# Altium PCB MCU.PcbDoc
Units mil, origin at the board's own origin, x right, y up, seen from the top; angles counter-clockwise.
Board outline 2836.05 x 2266.15 mil, 2 copper layers (Top Layer, Bottom Layer); 32 components, 32 nets, 152 pads, 29 vias.
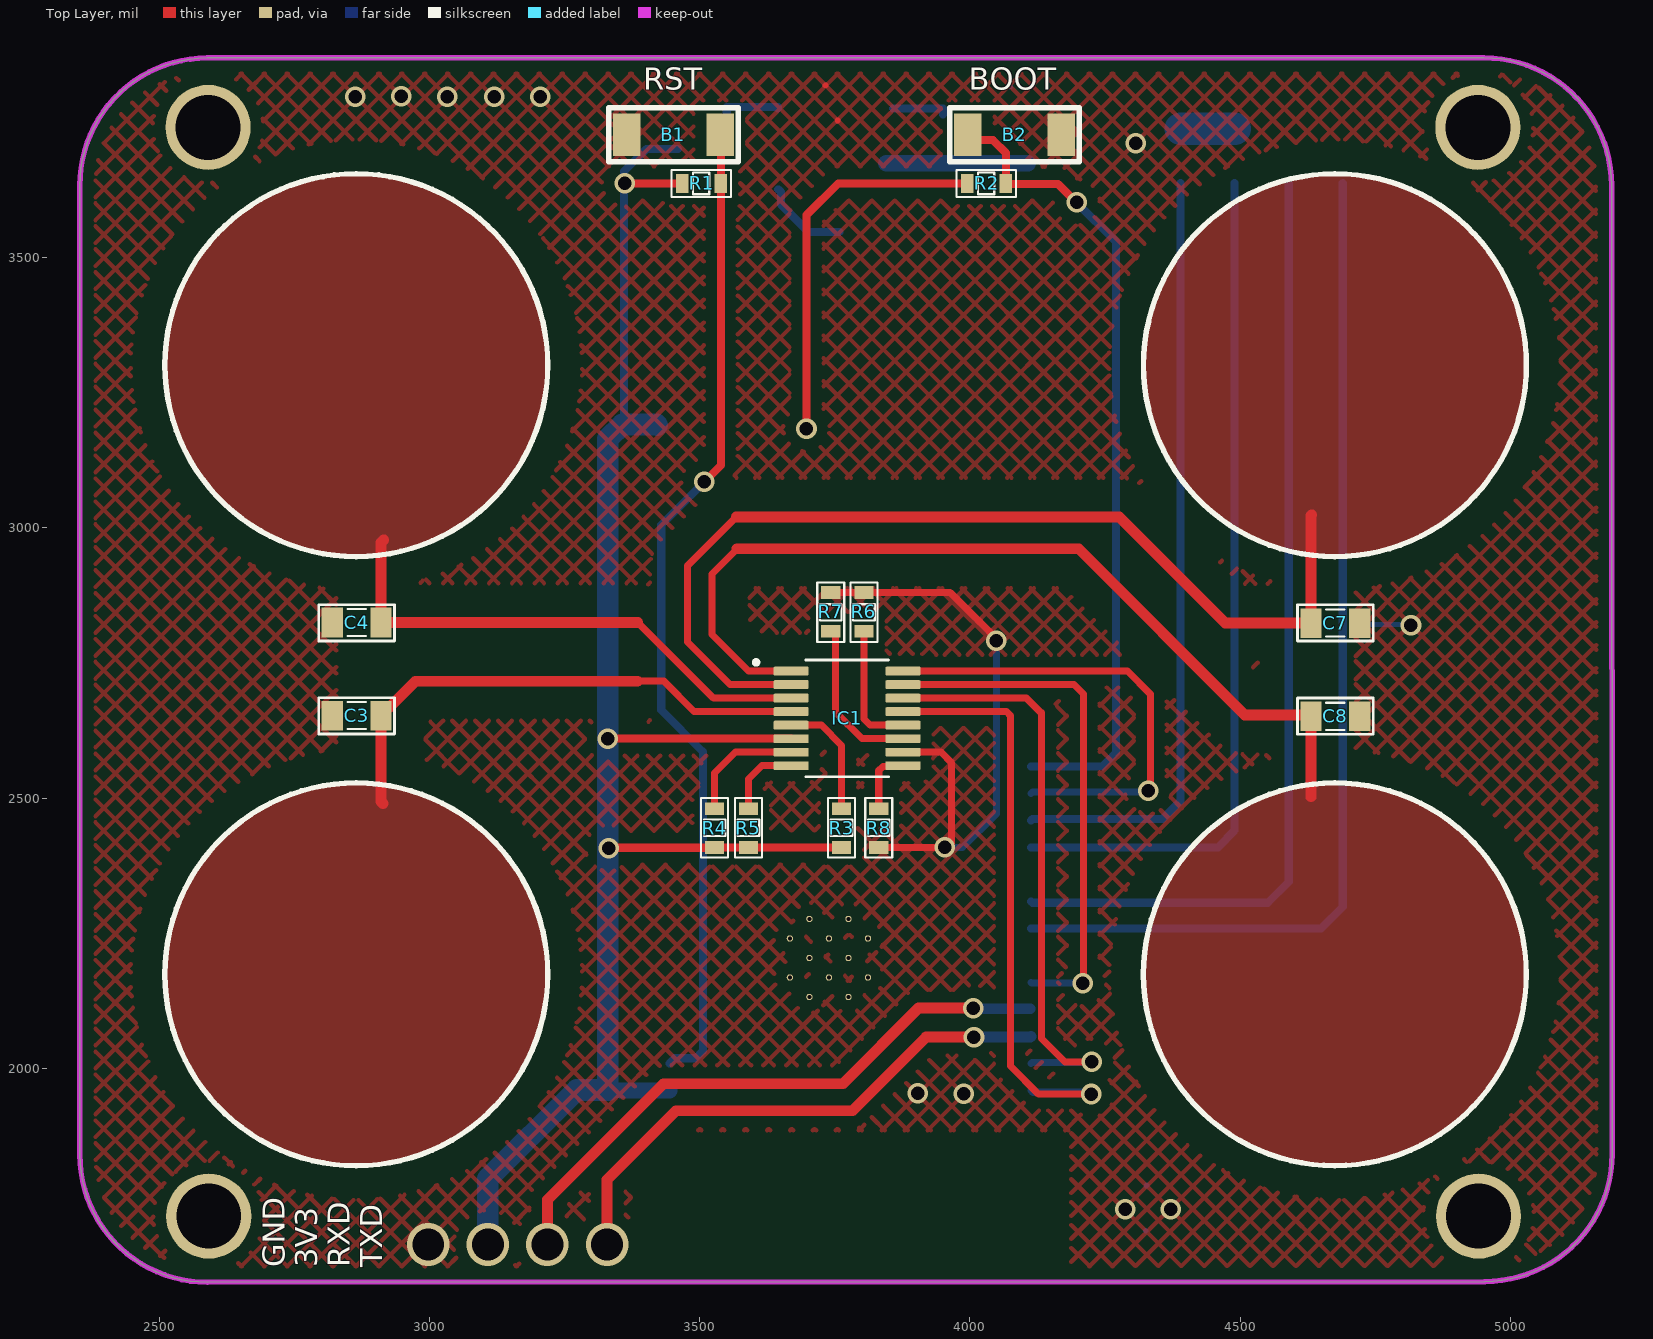
[diagram p0: Top Layer view]
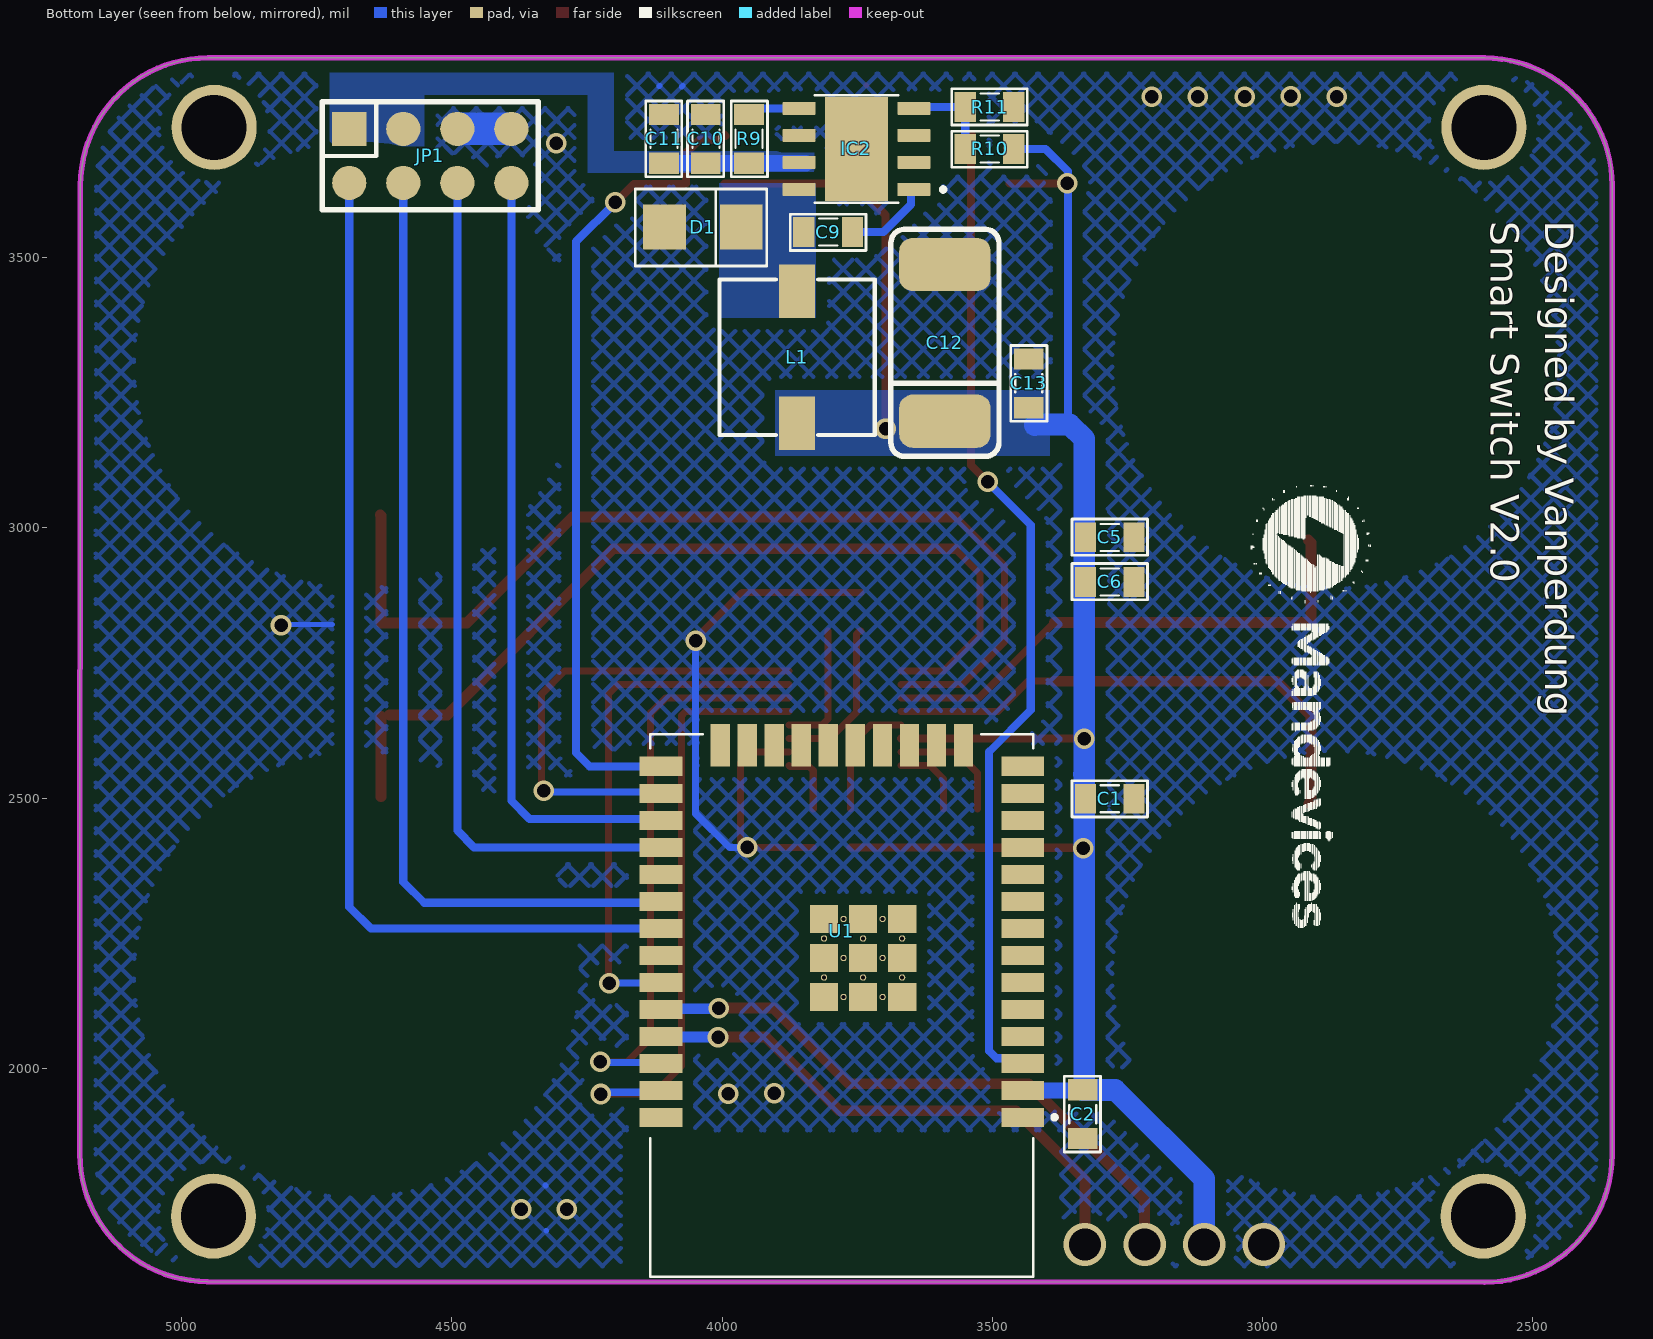
[diagram p1: Bottom Layer view, seen from below]
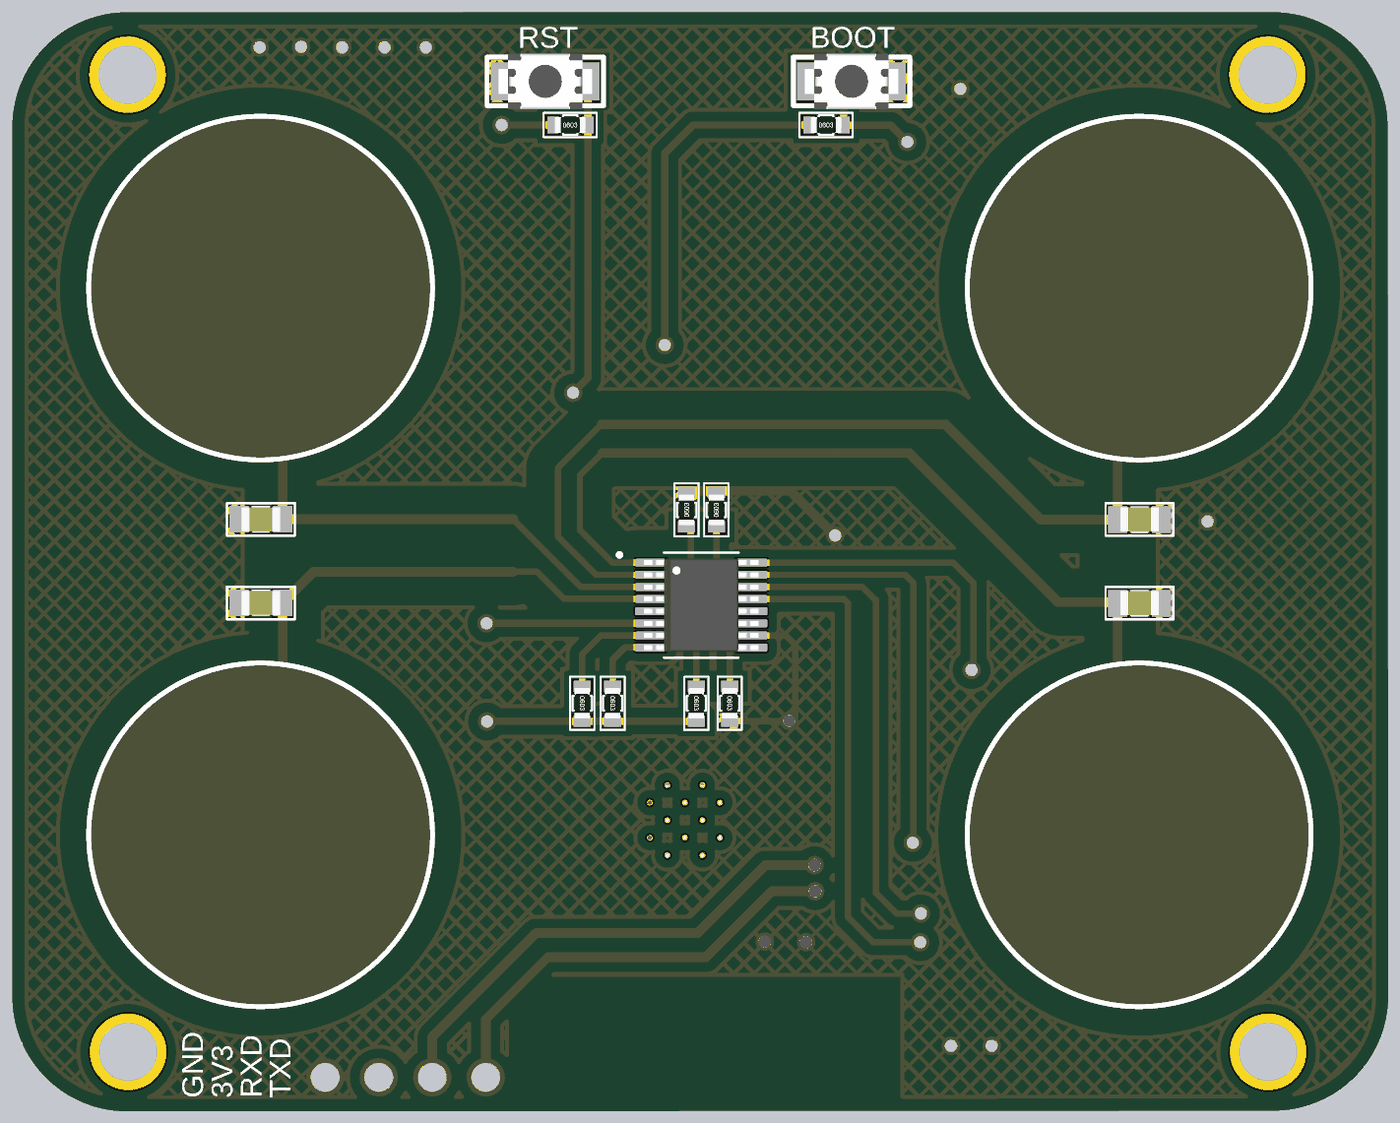
[diagram p2: 3D render of the assembled board from above, using the file's embedded part models]
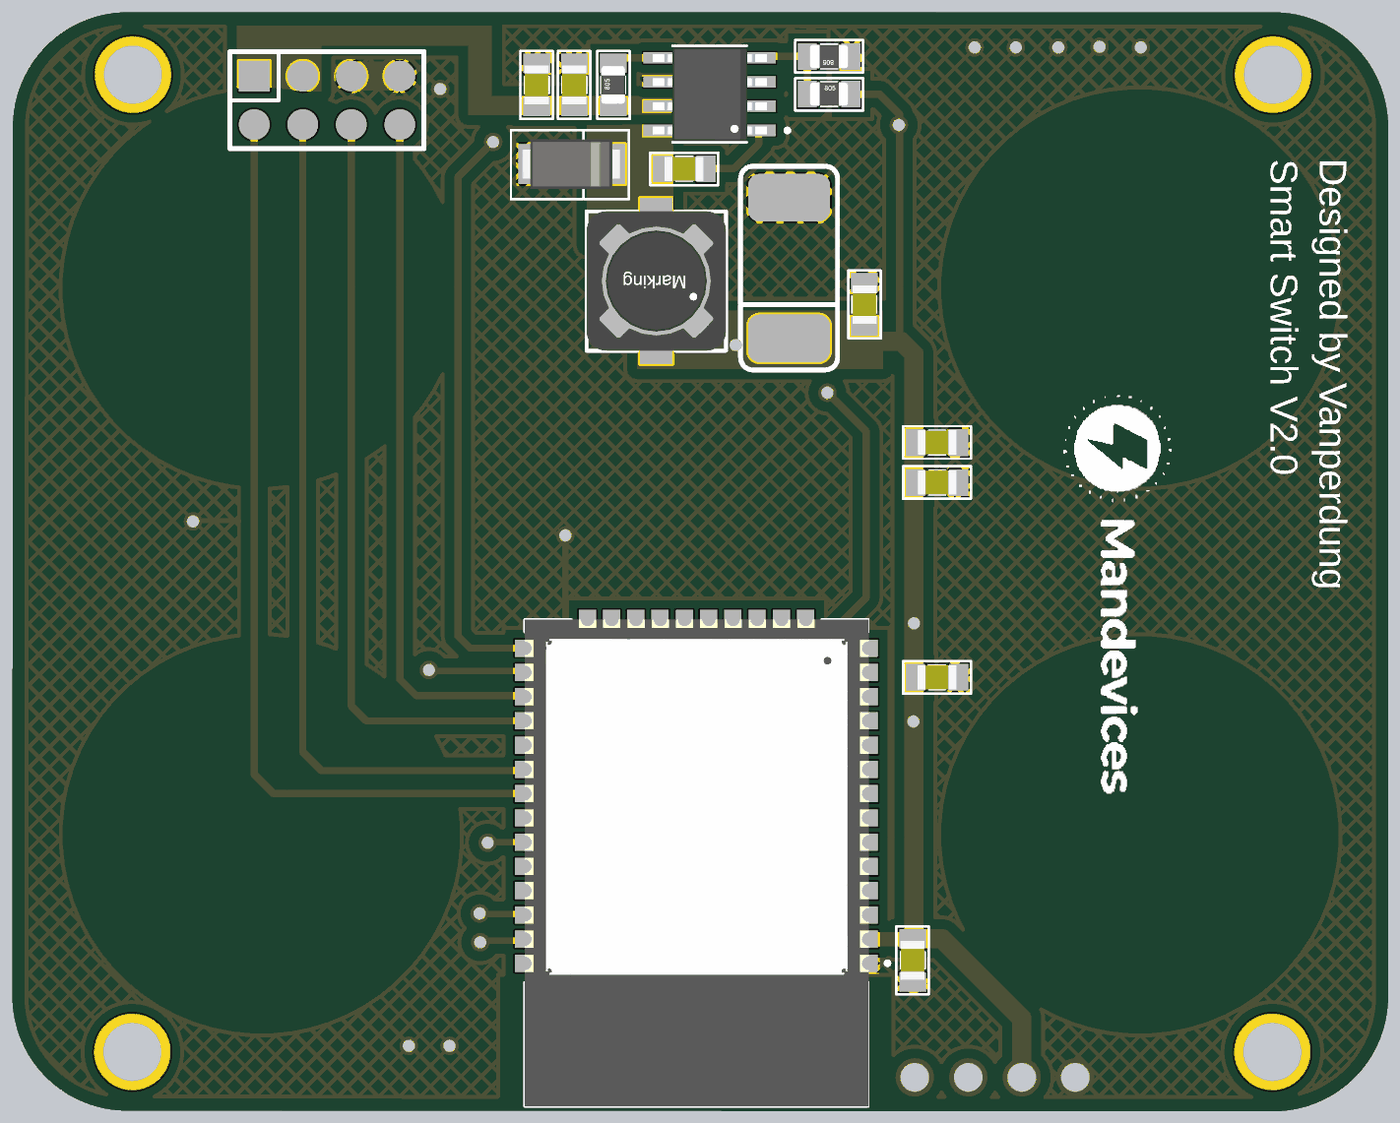
[diagram p3: 3D render of the assembled board from below, using the file's embedded part models]

## Layer stack, top to bottom
Top Solder: solder mask 0.4, Solder Resist, Dk 3.5
Top Layer: signal copper 1.4
Dielectric 1: dielectric 12.6, FR-4, Dk 4.8
Bottom Layer: signal copper 1.4
Bottom Solder: solder mask 0.4, Solder Resist, Dk 3.5

## Board outline
2352.68,1840.07 ccw(c2588.9,1840.07) 2588.9,1603.85 4952.43,1605.18 ccw(c4952.43,1841.4) 5188.65,1841.4 5187.47,3633.78 ccw(c4951.25,3633.78) 4951.25,3870 2588.82,3869.82 ccw(c2588.82,3633.6) 2352.6,3633.6

## Design rules (kind name [scope] priority, off if disabled: settings)
Clearance TP_Clearance [InNetClass('TP')] p1: gap=59.06 ignorepadtopadclearanceinfootprint=TRUE
Clearance [All] p2: gap=20 ignorepadtopadclearanceinfootprint=TRUE
PolygonConnect [All] p1: connectstyle=Direct reliefconductorwidth=10 reliefentries=4 polygonreliefangle="90 Angle" airgapwidth=10
RoutingVias [All] p1: holewidth=28 width=50 viastyle="Through Hole" minholewidth=15 minwidth=30 maxholewidth=118.11 maxwidth=78.74
SolderMaskExpansion [All] p1: expansion=4 istentingtop=FALSE
UnpouredPolygon [InNetClass('TP')] p1:
Width [All] p1: maxlimit=100 minlimit=10 preferedwidth=10
29 further rules are at their usual default settings.

## Classes and differential pairs
net class TP: NetC3_2 NetC4_2 NetC7_2 NetC8_2
component class TPS5430: C9 C10 C11 C12 C13 D1 IC2 L1 R9 R10 R11
component class ESP32: B1 B2 C1 C2 C3 C4 C5 C6 C7 C8 IC1 JP1 R1 R2 R3 R4 R5 R6 R7 R8 U1

## Components (designator, comment, footprint, x,y, rotation, side; value= is the part's Value field where it differs from the comment)
B1 "Button 3x4x2.5" "Button 3x4x2.5" 3451.25,3727.49 r0 top
B2 "Button 3x4x2.5" "Button 3x4x2.5" 4082.5,3727.5 r180 top
C1 "100nF" CAP_0805 3284.65,2586.86 r180 bottom value=33p
C2 "10uF" CAP_0805 3244.39,1917.15 r270 bottom value=33p
C3 "30pF" CAP_0805 2862.85,2740.61 r0 top value=33p
C4 "30pF" CAP_0805 2862.85,2912.86 r0 top value=33p
C5 "100nF" CAP_0805 3280.35,2894.39 r0 bottom value=33p
C6 "10uF" CAP_0805 3280.35,2811.89 r0 bottom value=33p
C7 "30pF" CAP_0805 4678.4,2735.64 r180 top value=33p
C8 "30pF" CAP_0805 4678.4,2563.14 r180 top value=33p
C9 "100nF" CAP_0805 3805.9,3635.61 r180 bottom value=33p
C10 "100nF" CAP_0805 3941.89,3722.15 r270 bottom value=33p
C11 "10uF" CAP_0805 4019.39,3722.15 r270 bottom value=33p
C12 "220uF" CAP_7343 3587.5,3347.5 r90 bottom
C13 "10uF" CAP_0805 3520.61,3265.35 r90 bottom value=33p
D1 "SS14" DO-214AC(SMA) 4057.5,3553.75 r0 bottom value=1N5007
IC1 "TTP224" TTP224 3792.35,2667.66 r0 top
IC2 "TPS5430-2" TPS5430 3750.89,3700.94 r0 bottom
JP1 "JP 2x4 2.54" JP2x4_PAD 4541.25,3687.5 r180 bottom
L1 "22uH" L_SMD 3867.16,3327.61 r180 bottom value="150 mH"
R1 "10k" RES-SMD-0603 3502.5,3637.5 r0 top
R2 "10k" RES-SMD-0603 4030,3637.5 r0 top
R3 "0R" RES-SMD-0603 3762.5,2445 r270 top
R4 "0R" RES-SMD-0603 3527.5,2445 r270 top
R5 "0R" RES-SMD-0603 3590,2445 r270 top
R6 "0R" RES-SMD-0603 3803.75,2843.75 r90 top
R7 "0R" RES-SMD-0603 3742.5,2843.75 r90 top
R8 "0R" RES-SMD-0603 3831.25,2445 r270 top
R9 "100k" RES-SMD-0805 3950,3720 r90 bottom
R10 "10k" RES-SMD-0805 3505,3701.25 r180 bottom
R11 "6.2k" RES-SMD-0805 3505,3778.75 r0 bottom
U1 "ESP32-WROOM-32" MODULE_ESP32-WROOM-32 3778.4,2115.84 r0 bottom

## Footprints (in the part's own frame and the unit in brackets; to place one, negate y for a bottom-side part, rotate by r counter-clockwise, add the part's x,y. Pads: shape width x height; smd on the part's side, far side on the other; paste and mask are expansions set on the pad)
"Button 3x4x2.5" [mm]
  rect 1.3x2 smd: 1(-2.2,0) 2(2.2,0)
  silkscreen extent -3.05,-1.27 3.05,1.27, body extent -2.45,-1.45 2.45,1.45, height 2
CAP_0805 [mil]
  rect 39.37x55 smd: 1(-42.85,-88.11) 2(47.15,-88.11)
  silkscreen extent -68,-122 72,-55, body extent -38,-114 42,-64, height 24
CAP_7343 [mm] "Capacitor Tantalum 7343"
  rrect50% 2.5x4.3 smd: 1(-3.81,0) 2(3.556,0)
  silkscreen extent -5.46,-2.54 5.21,2.54, body extent -3.81,-2.29 3.56,2.29, height 3
DO-214AC(SMA) [mm] "DO-214AC Diode Smallest Size"
  rect 2x2.1 smd: 1(1.245,-0.076) 2(-2.367,-0.076)
  silkscreen extent -3.56,-1.86 2.62,1.76, body extent -3.13,-1.38 2.07,1.22, height 2.4
JP2x4_PAD [mm]
  rect 1.61x1.6 smd: 1(-3.777,1.294)
  oval 1.61x1.6 smd: 2(-1.237,1.294) 3(1.303,1.294) 4(3.843,1.294) 5(3.843,-1.246) 6(1.303,-1.246) 7(-1.237,-1.246) 8(-3.777,-1.246)
  silkscreen extent -5.05,-2.52 5.11,2.56
L_SMD [mm]
  rect 1.7x2.5 smd: 1(0.15,2.8) 2(0.15,-3.4)
  silkscreen extent -3.5,-3.95 3.8,3.35, body extent -3.5,-3.95 3.8,3.35, height 4.05
MODULE_ESP32-WROOM-32 [mm]
  rect 2x0.9 smd: 1(-8.5,5.26) 2(-8.5,3.99) 3(-8.5,2.72) 4(-8.5,1.45) 5(-8.5,0.18) 6(-8.5,-1.09) 7(-8.5,-2.36) 8(-8.5,-3.63) 9(-8.5,-4.9) 10(-8.5,-6.17) 11(-8.5,-7.44) 12(-8.5,-8.71) 13(-8.5,-9.98) 14(-8.5,-11.25) 25(8.5,-11.25) 26(8.5,-9.98) 27(8.5,-8.71) 28(8.5,-7.44) 29(8.5,-6.17) 30(8.5,-4.9) 31(8.5,-3.63) 32(8.5,-2.36) 33(8.5,-1.09) 34(8.5,0.18) 35(8.5,1.45) 36(8.5,2.72) 37(8.5,3.99) 38(8.5,5.26)
  rect 0.9x2 smd: 15(-5.715,-12.25) 16(-4.445,-12.25) 17(-3.175,-12.25) 18(-1.905,-12.25) 19(-0.635,-12.25) 20(0.635,-12.25) 21(1.905,-12.25) 22(3.175,-12.25) 23(4.445,-12.25) 24(5.715,-12.25)
  rect 1.33x1.33 smd: 39_1(-2.835,-0.405) 39_2(-1,-0.405) 39_3(0.835,-0.405) 39_4(-2.835,-2.24) 39_5(-1,-2.24) 39_6(0.835,-2.24) 39_7(-2.835,-4.075) 39_8(-1,-4.075) 39_9(0.835,-4.075)
  round 0.3 hole 0.2: 39_10(-1.917,-0.405) 39_11(-0.083,-0.405) 39_12(-2.835,-1.322) 39_13(-1,-1.322) 39_14(0.835,-1.323) 39_15(-1.917,-2.24) 39_16(-0.082,-2.24) 39_17(-2.835,-3.157) 39_18(-1,-3.157) 39_19(0.835,-3.157) 39_20(-1.917,-4.075) 39_21(-0.082,-4.075)
  silkscreen extent -10.1,-12.75 9,12.75, body extent -9.02,-12.75 8.98,12.75, height 3.2
RES-SMD-0603 [mm]
  rect 0.6x0.9 smd: 1(-0.889,0) 2(0.927,0)
  silkscreen extent -1.4,-0.64 1.4,0.64, body extent -0.8,-0.4 0.8,0.4, height 0.43
RES-SMD-0805 [mil]
  rect 39.37x55 smd: 1(-45,0) 2(45,0)
  silkscreen extent -70,-34 70,33, body extent -39,-25 39,25, height 31
TPS5430 [mm]
  rrect10% 1.55x0.6 smd mask+0: 1(-2.692,1.897) 2(-2.692,0.627) 3(-2.692,-0.643) 4(-2.692,-1.913) 5(2.708,-1.913) 6(2.708,-0.643) 7(2.708,0.627) 8(2.708,1.897)
  rect 2.95x4.9 smd paste-3 mask+0: 9(0.008,-0.008)
  silkscreen extent -4.16,-2.53 1.96,2.52, body extent -3,-2.45 3,2.45, height 1.7
TTP224 [mm]
  rrect25% 1.65x0.41 smd: 1(-3.129,1.71) 2(-3.129,1.075) 3(-3.129,0.44) 4(-3.129,-0.195) 5(-3.129,-0.83) 6(-3.129,-1.465) 7(-3.129,-2.1) 8(-3.129,-2.735) 9(2.131,-2.735) 10(2.131,-2.1) 11(2.131,-1.465) 12(2.131,-0.83) 13(2.131,-0.195) 14(2.131,0.44) 15(2.131,1.075) 16(2.131,1.71)
  silkscreen extent -4.88,-3.26 1.45,2.24, body extent -3.5,-2.96 2.5,1.94, height 1.75

## Part data
C1 C2 C3 C4 C5 C6 C7 C8 C9 C10 C11 C13: library part CapSMD, "Capacitor", LatestRevisionDate=17-Jul-2002, LatestRevisionNote="Re-released for DXP Platform.", PackageReference=RAD-0.3, Published=8-Jun-2000, Publisher="Altium Limited"
C12: library part CAP_TAN_SMD, "Polazied Tantalum Capacitor"
D1: library part "Diode SMD", "SS34 Diode Schottky 3A 40V SMA(DO-214AC)", Code - JEDEC=DO-214-AB, Published=8-Jun-2000, Publisher="Altium Limited", Revision="July-2002: Re-released for DXP Platform."
JP1: library part "JP 2x4 2.54 Duc Thang", "Cắm", Chung_Loai=Cắm, Don_Vi=Con, Ma_Hang=MH002686, Ten_Linh_Kien="Jump Đôi Đực 2.54MM 2x40P Thẳng 11MM"
L1: library part Inductor, "CD73R 22uH 1.23A 7345"
R1 R2 R3 R4 R5 R6 R7 R8 R9 R10 R11: library part "Resistor - SMD", "Resistor", Manufacturer="Generic Components", Class=Passive, Published=08/06/2000, Publisher="Altium Hobart Technology Centre"
U1: "Bluetooth, WiFi Transceiver Module 2.4GHz ~ 2.5GHz Surface Mount", Package="Module Espressif Systems", Digi-Key_Part_Number=1904-1010-1-ND, Digi-Key_Purchase_URL=https://www.digikey.com/product-detail/en/espressif-systems/ESP32-WROOM-32/1904-1010-1-ND/8544305?utm_source=snapeda&utm_medium=aggregator&utm_campaign=symbol, MF="Espressif Systems", MP=ESP32-WROOM-32, SnapEDA_Link=https://www.snapeda.com/parts/ESP32-WROOM-32/Espressif%20Systems/view-part/2753322/?ref=snap

## Free pads (board coordinates)
  round 157.48 hole 120: 0(2590,3741.25) 0(2591.25,1726.25) 0(4940,3741.25) 0(4941.25,1726.25)

## Via types
v1: diameter 38, hole 25, Top Layer to Bottom Layer, tented both sides, 25 vias
v2: diameter 78.74, hole 59.06, Top Layer to Bottom Layer, 4 vias

## Nets (pads, with @x,y where several pads share a name; then routed paths per layer and width w, separated by ;. In a path a pad name is that pad's centre, name@x,y a point inside that pad or via, vN(x,y) a via of type N, cw(c..) or ccw(c..) an arc to the next point about the centre after c; other vN are vias at no path point)
+3.3V: C1.1 C2.1 C5.2 C6.2 C12.1 C13.1 IC1.6 L1.2 R1.1 R2.1 R3.2 R4.2 R5.2 R10.2 U1.2 | length 3981.1
  Top Layer w15: v1(3330,2610) IC1.6 ; v1(3331.25,2407.5) 3331.76,2408.01 3527,2408.01 R4.2 R5.2 R3.2 ; v1(3361.25,3637.5) R1.1 ; v1(3697.5,3183.75) 3697.5,3578.75 3756.25,3637.5 R2.1
  Bottom Layer w15: 3356.25,3191.25 3360,3195 3360,3660 3401.25,3701.25 R10.2
  Bottom Layer w30: C2.1@3353.43,1958.75 U1.2@3443.75,1958.75
  Bottom Layer w40: v2(3107.81,1673.75) 3107.81,1795.31 3272.19,1959.69 3332.19,1959.69 C2.1 ; C2.1@3330,1970 C1.1@3330,2524.69 ; 3330,2547.14 v1(3330,2610) 3330,3165 3356.25,3191.25 3420,3191.25 3421.25,3190 ; C1.1@3330.03,2524.73 3330.03,2544.07 3330.35,2544.39
+12: C10.2 C11.2 IC2.7 JP1.1 JP1.2 R9.1 | length 255
  Bottom Layer w30: IC2.7@3845,3675 R9.1@3942.5,3675 ; R9.1 C10.2 C11.2
AHLB: IC1.5 R3.1 | length 226.4
  Top Layer w13: IC1.5 3725,2635 3762.5,2597.5 R3.1
EN: B1.2 R1.2 U1.3 | length 1845.1
  Top Layer w15: v1(3508.59,3085.45) 3538.99,3115.84 R1.2 3538.99,3726.36 B1.2
  Bottom Layer w15: U1.3 3453.53,2018.53 3492.44,2018.53 3505.62,2031.71 3505.62,2585.79 3428.75,2662.66 3428.75,3005.61 v1(3508.59,3085.45)
GND: B1.1 B2.1 C1.2 C2.2 C3.1 C4.1 C5.1 C6.1 C7.1 C8.1 C10.1 C11.1 C12.2 C13.2 D1.1 IC1.10 IC2.6 IC2.9 JP1.3 JP1.4 R6.2 R7.2 R8.2 R11.1 U1.1 | length 1369.8
  Top Layer w10: 3732.5,3818.75 3732.83,3819.08 ; 3755,3753.75 3755.36,3754.11 ; v1(4371.25,1738.75) 4371.25,1738.15 v1@4371.58,1737.83
  Top Layer w13: R7.2 R6.2 3963.51,2880.24 4048.75,2795 v1(4048.75,2791.25) ; R8.2 v1@3953.75,2408.51 ; IC1.10 3946.25,2585 3966.25,2565 v1@3966.25,2416.13
  Bottom Layer w10: v1(2862.5,3797.5) 2863.45,3797.5 v1@2863.6,3797.35 ; v1(2947.5,3798.75) v1@2948.86,3797.39 ; v1(3032.5,3797.5) v1@3032.83,3797.83 ; v1@3118.38,3797.13 3119.63,3797.13 v1(3120,3797.5) ; v1@3203.93,3796.43 v1(3205,3797.5) ; v1(3903.75,1953.75) 3903.75,1952.5 v1@3903.93,1952.32 ; v1(3988.75,1952.5) v1@3988.86,1952.39 ; 4072.5,3818.75 4074.97,3816.28 4075.03,3816.28 ; 4115.37,3818.38 4116.25,3817.5 ; v1@4286.65,1737.9 v1(4287.5,1738.75) ; 4325,1698.75 4325.4,1699.15 ; 4326.58,1782.83 4327.5,1783.75 ; 4721.45,2821.25 4815,2821.25 v1(4816.25,2820)
  Bottom Layer w13: v1(3953.75,2408.75) 3986.56,2408.75 4048.75,2470.94 v1(4048.75,2791.25)
  Bottom Layer w60: JP1.4 JP1.3
  other v1: 4306.8,3711.8
  other v2: 2997.5,1673.75
IO0: B2.2 R2.2 U1.25 | length 1505.7
  Top Layer w15: B2.2@3993.51,3725.13 B2.2 4005.89,3717.5 4042.5,3717.5 4066.49,3693.51 R2.2 4070.03,3637.5 4070.8,3636.74 4163.26,3636.74 v1(4197.5,3602.5)
  Bottom Layer w15: U1.25 4245,2558.75 4270,2583.75 4270,3530 v1(4197.5,3602.5)
IO4: IC1.16 U1.26 | length 874.4
  Top Layer w13: IC1.16 4291.25,2735 4333.75,2692.5 4333.75,2517.5 v1(4330,2513.75)
  Bottom Layer w13: U1.26 4115.54,2511.25 4327.5,2511.25 v1(4330,2513.75)
IO13: U1.16
IO16: JP1.5 U1.27 | length 1435.4
  Bottom Layer w15: U1.27 4115.54,2461.25 4356.25,2461.25 4389.95,2494.95 JP1.5
IO17: JP1.6 U1.28 | length 1588.3
  Bottom Layer w15: U1.28 4458.75,2408.75 4489.95,2439.95 JP1.6
IO18: JP1.7 U1.30 | length 1787.5
  Bottom Layer w15: U1.30 4115.54,2306.25 4551.25,2306.25 4589.95,2344.95 JP1.7
IO19: JP1.8 U1.31 | length 1933.2
  Bottom Layer w15: U1.31 4650,2258.75 4689.95,2298.7 JP1.8
IO21: IC1.15 U1.33 | length 972.7
  Top Layer w13: IC1.15 4192.5,2710 4210,2692.5 4210,2655 4210,2158.75 v1(4208.75,2157.5)
  Bottom Layer w13: U1.33 4113.67,2158.12 4208.12,2158.12 v1(4208.75,2157.5)
IO22: IC1.14 U1.36 | length 1095.5
  Top Layer w13: IC1.14 4104.3,2685 4130.55,2658.75 4132.5,2658.75 4132.5,2055 4175.74,2011.76 v1(4225.51,2011.76)
  Bottom Layer w13: U1.36 4114.55,2010.26 4224.01,2010.26 v1(4225.51,2011.76)
IO23: IC1.13 U1.37 | length 1134.8
  Top Layer w13: IC1.13 4067.38,2660 4075,2652.38 4075,2632.5 4075,2003.75 4126.47,1952.28 v1(4224.16,1952.28)
  Bottom Layer w13: U1.37 4116.28,1955.51 4220.92,1955.51 v1(4224.16,1952.28)
IO25: U1.10
IO33: U1.9
LPMB: IC1.8 R5.1 | length 144.5
  Top Layer w13: R5.1 3590,2535 3615,2560 IC1.8
MOT0: IC1.9 R8.1 | length 119.6
  Top Layer w13: R8.1 3831.25,2550.81 3838.87,2558.43 3874.68,2558.43 IC1.9
NetC3_2: C3.2 IC1.4 | length 972.9
  Top Layer w13: 3385,2716.25 3433.75,2716.25 3489.57,2660.43 3668.73,2660.43 IC1.4
  Top Layer w20: 2913.75,2490 2910,2493.75 C3.2 2973.75,2716.25 3385,2716.25
NetC4_2: C4.2 IC1.3 | length 971.9
  Top Layer w13: 3385.25,2824.75 3525,2685 IC1.3
  Top Layer w20: 2915,2977.5 2910,2972.5 C4.2 3385.25,2824.75
NetC7_2: C7.2 IC1.2 | length 1838.4
  Top Layer w13: 3567.5,3020 3477.5,2930 3477.5,2788.75 3556.25,2710 IC1.2
  Top Layer w20: 3567.5,3020 4276.25,3020 4472.5,2823.75 C7.2 4631.25,3022.5 4632.5,3023.75
NetC8_2: C8.2 IC1.1 | length 1675.2
  Top Layer w13: 3568.75,2961.25 3522.5,2915 3522.5,2802.5 3590,2735 IC1.1
  Top Layer w20: 3568.75,2961.25 4201.25,2961.25 4508.75,2653.75 C8.2@4615.28,2653.75 ; 4631.25,2502.5 C8.2
NetC9_1: C9.1 D1.2 IC2.8 L1.1
NetC9_2: C9.2 IC2.1 | length 160.1
  Bottom Layer w15: IC2.1 3645.69,3626.25 3650,3621.94 3650,3598.75 3701.25,3547.5 C9.2
NetIC2_4: IC2.4 R10.1 R11.2 | length 174.9
  Bottom Layer w15: R10.1 R11.2 3644.9,3778.75 IC2.4
NetIC2_5: IC2.5 R9.2 | length 103.8
  Bottom Layer w15: IC2.5 3950,3776.25 R9.2
OD: IC1.11 R7.1 | length 300.8
  Top Layer w13: R7.1 3745.94,2808.75 3751.25,2803.44 3751.25,2658.75 3800,2610 IC1.11
RXD: U1.34 | length 1125.7
  Top Layer w20: v2(3218.12,1673.75) 3218.12,1756.59 3432.79,1971.25 3765,1971.25 3905,2111.25 v1(4006.25,2111.25)
  Bottom Layer w15: v1(4006.25,2111.25) v1@4007.5,2110 ; U1.34@4111.79,2110 U1.34
  Bottom Layer w20: v1@4007.5,2110 U1.34@4111.79,2110
SM: IC1.12 R6.1 | length 239.7
  Top Layer w13: R6.1 3803.75,2646.25 3815,2635 IC1.12
TOG: IC1.7 R4.1 | length 224
  Top Layer w13: R4.1 3527.5,2546.25 3566.25,2585 IC1.7
TXD: U1.35 | length 1014.2
  Top Layer w20: v2(3328.44,1673.75) 3328.44,1793.44 3456.25,1921.25 3782.5,1921.25 3918.75,2057.5 v1(4007.5,2057.5)
  Bottom Layer w20: v1(4007.5,2057.5) 4111.79,2057.5 U1.35
pads on no net: IC2.2 IC2.3 U1.4 U1.5 U1.6 U1.7 U1.8 U1.11 U1.12 U1.13 U1.14 U1.15 U1.17 U1.18 U1.19 U1.20 U1.21 U1.22 U1.23 U1.24 U1.29 U1.32 U1.38 U1.39_1 U1.39_2 U1.39_3 U1.39_4 U1.39_5 U1.39_6 U1.39_7 U1.39_8 U1.39_9 U1.39_10 U1.39_11 U1.39_12 U1.39_13 U1.39_14 U1.39_15 U1.39_16 U1.39_17 U1.39_18 U1.39_19 U1.39_20 U1.39_21

## Polygon pours and split planes (outlines as drawn)
GND on Top Layer "100" (hatched 45Degree grid 30 track 8, pour order 19): 2352.68,1840.07 2352.6,3633.6 cw(c2588.82,3633.6) 2588.82,3869.82 4951.25,3870 cw(c4951.25,3633.78) 5187.47,3633.78 5188.65,1841.4 cw(c4952.43,1841.4) 4952.43,1605.18 2588.9,1603.85 cw(c2588.9,1840.07)
NetC8_2 on Top Layer "100" (solid, pour order 3): 4321.03,2173.78 ccw(c4675.36,2173.78) 4675.36,1819.45 ccw(c4675.36,2173.78) 5029.69,2173.78 ccw(c4675.36,2173.78) 4675.36,2528.11 ccw(c4675.36,2173.78)
NetC3_2 on Top Layer "100" (solid, pour order 2): 2510.05,2173.75 ccw(c2864.38,2173.75) 2864.38,1819.42 ccw(c2864.38,2173.75) 3218.71,2173.75 ccw(c2864.38,2173.75) 2864.38,2528.09 ccw(c2864.38,2173.75)
NetC7_2 on Top Layer "100" (solid, pour order 1): 4321.14,3301.15 ccw(c4675.47,3301.15) 4675.47,2946.82 ccw(c4675.47,3301.15) 5029.8,3301.15 ccw(c4675.47,3301.15) 4675.47,3655.48 ccw(c4675.47,3301.15)
NetC4_2 on Top Layer "100" (solid, pour order 0): 2864.38,2946.91 cw(c2864.38,3301.25) 2510.05,3301.25 cw(c2864.38,3301.25) 2864.38,3655.58 cw(c2864.38,3301.25) 3218.71,3301.25 cw(c2864.38,3301.25)
GND on Bottom Layer "100" (hatched 45Degree grid 30 track 8, pour order 20): 2351.72,1849.64 2351.65,3643.17 cw(c2587.87,3643.17) 2587.87,3879.39 4950.29,3879.57 cw(c4950.29,3643.35) 5186.51,3643.35 5187.69,1850.97 cw(c4951.47,1850.97) 4951.47,1614.74 2587.94,1613.42 cw(c2587.94,1849.64)
+3.3V on Bottom Layer "100" (solid, pour order 7): 3901.25,3133.75 3393.75,3133.75 3393.75,3255 3901.25,3255
NetC9_1 on Bottom Layer "100" (solid, pour order 6): 3826.25,3638.75 3826.25,3388.75 4005,3388.75 4005,3637.5
+12 on Bottom Layer "100" (solid, pour order 5): 4551.25,3706.25 4551.25,3801.25 4248.75,3801.25 4248.75,3657.5 3821.25,3657.5 3821.25,3697.5 4200,3697.5 4200,3842.5 4726.25,3842.5 4726.25,3706.25

## Keep-outs
Keep-Out Layer:
  the board outline again, w10

## Other copper
Bottom Layer:
  pour cut-out: 4262.08,3301.15 ccw(c4675.47,3301.15) 4675.47,2887.77 ccw(c4675.47,3301.15) 5088.86,3301.15 ccw(c4675.47,3301.15) 4675.47,3714.54 ccw(c4675.47,3301.15)
  pour cut-out: 4261.97,2173.78 ccw(c4675.36,2173.78) 4675.36,1760.4 ccw(c4675.36,2173.78) 5088.75,2173.78 ccw(c4675.36,2173.78) 4675.36,2587.17 ccw(c4675.36,2173.78)
  pour cut-out: 2451,2173.75 ccw(c2864.38,2173.75) 2864.38,1760.37 ccw(c2864.38,2173.75) 3277.77,2173.75 ccw(c2864.38,2173.75) 2864.38,2587.14 ccw(c2864.38,2173.75)
  pour cut-out: 2864.38,2887.86 cw(c2864.38,3301.25) 2451,3301.25 cw(c2864.38,3301.25) 2864.38,3714.63 cw(c2864.38,3301.25) 3277.77,3301.25 cw(c2864.38,3301.25)
Multi-Layer:
  pour cut-out: 3372.5,1605 4187.5,1605 4187.5,1885 3372.5,1885

## Silkscreen, mask and mechanical layers (free items; w line width, h text height)
Top Overlay:
  circle w10: c4675.47,3301.15 r354.33
  circle w10: c4675.36,2173.78 r354.33
  circle w10: c2864.38,2173.75 r354.33
  circle w10: c2864.38,3301.25 r354.33
  text "RST" at 3395,3797.03 h70
  text "BOOT" at 3997.5,3797.03 h70
  text "GND" at 2745.47,1631.25 h70 r90
  text "3V3" at 2806.21,1631.25 h70 r90
  text "RXD" at 2866.22,1631.25 h70 r90
  text "TXD" at 2926.13,1631.25 h70 r90
Bottom Overlay:
  drawing of 657 lines, arcs and shapes, not listed
  text "Designed by Vanperdung" at 2493.72,3568.56 h90 r90
  text "Smart Switch V2.0" at 2594.63,3567.31 h90 r90